# EAGLE board NixieClock_2_1 (EAGLE 9.2.1)
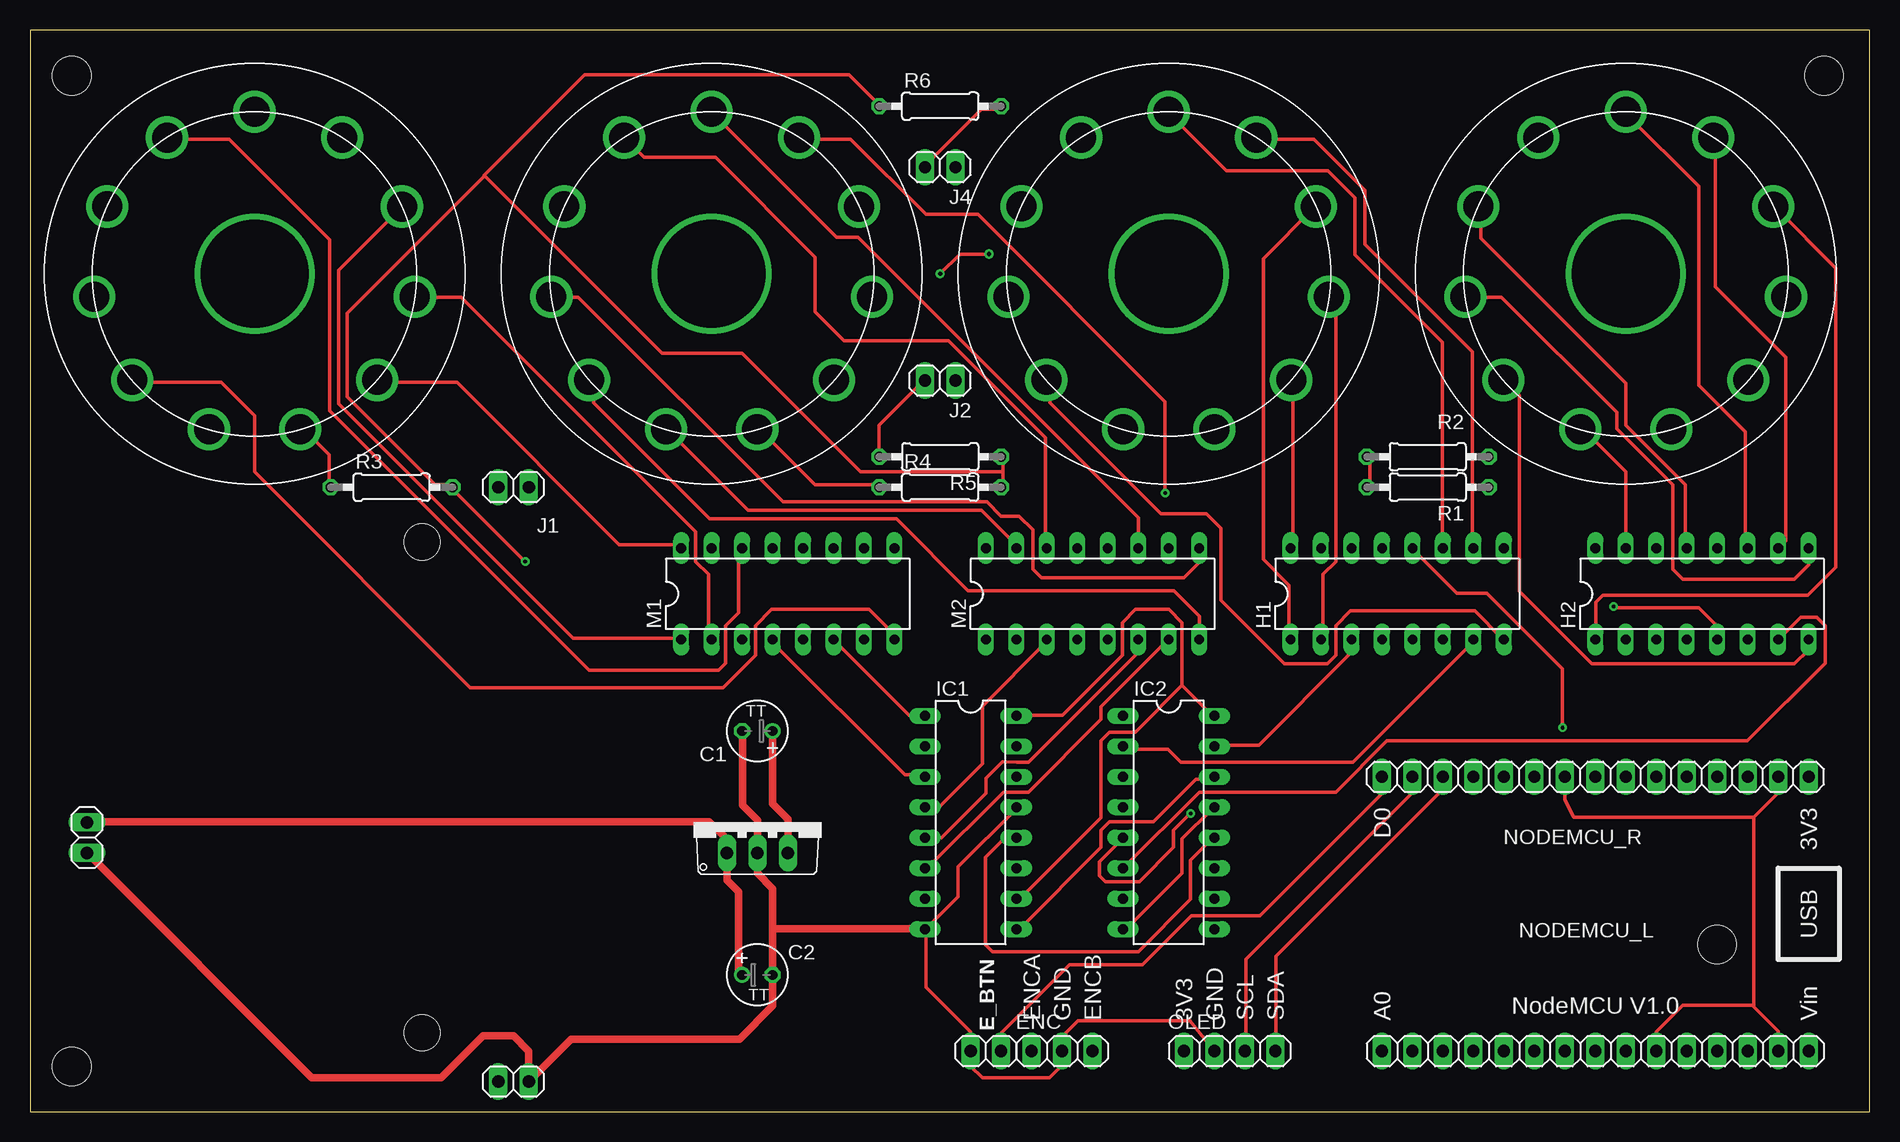
[diagram p0: board, top side]
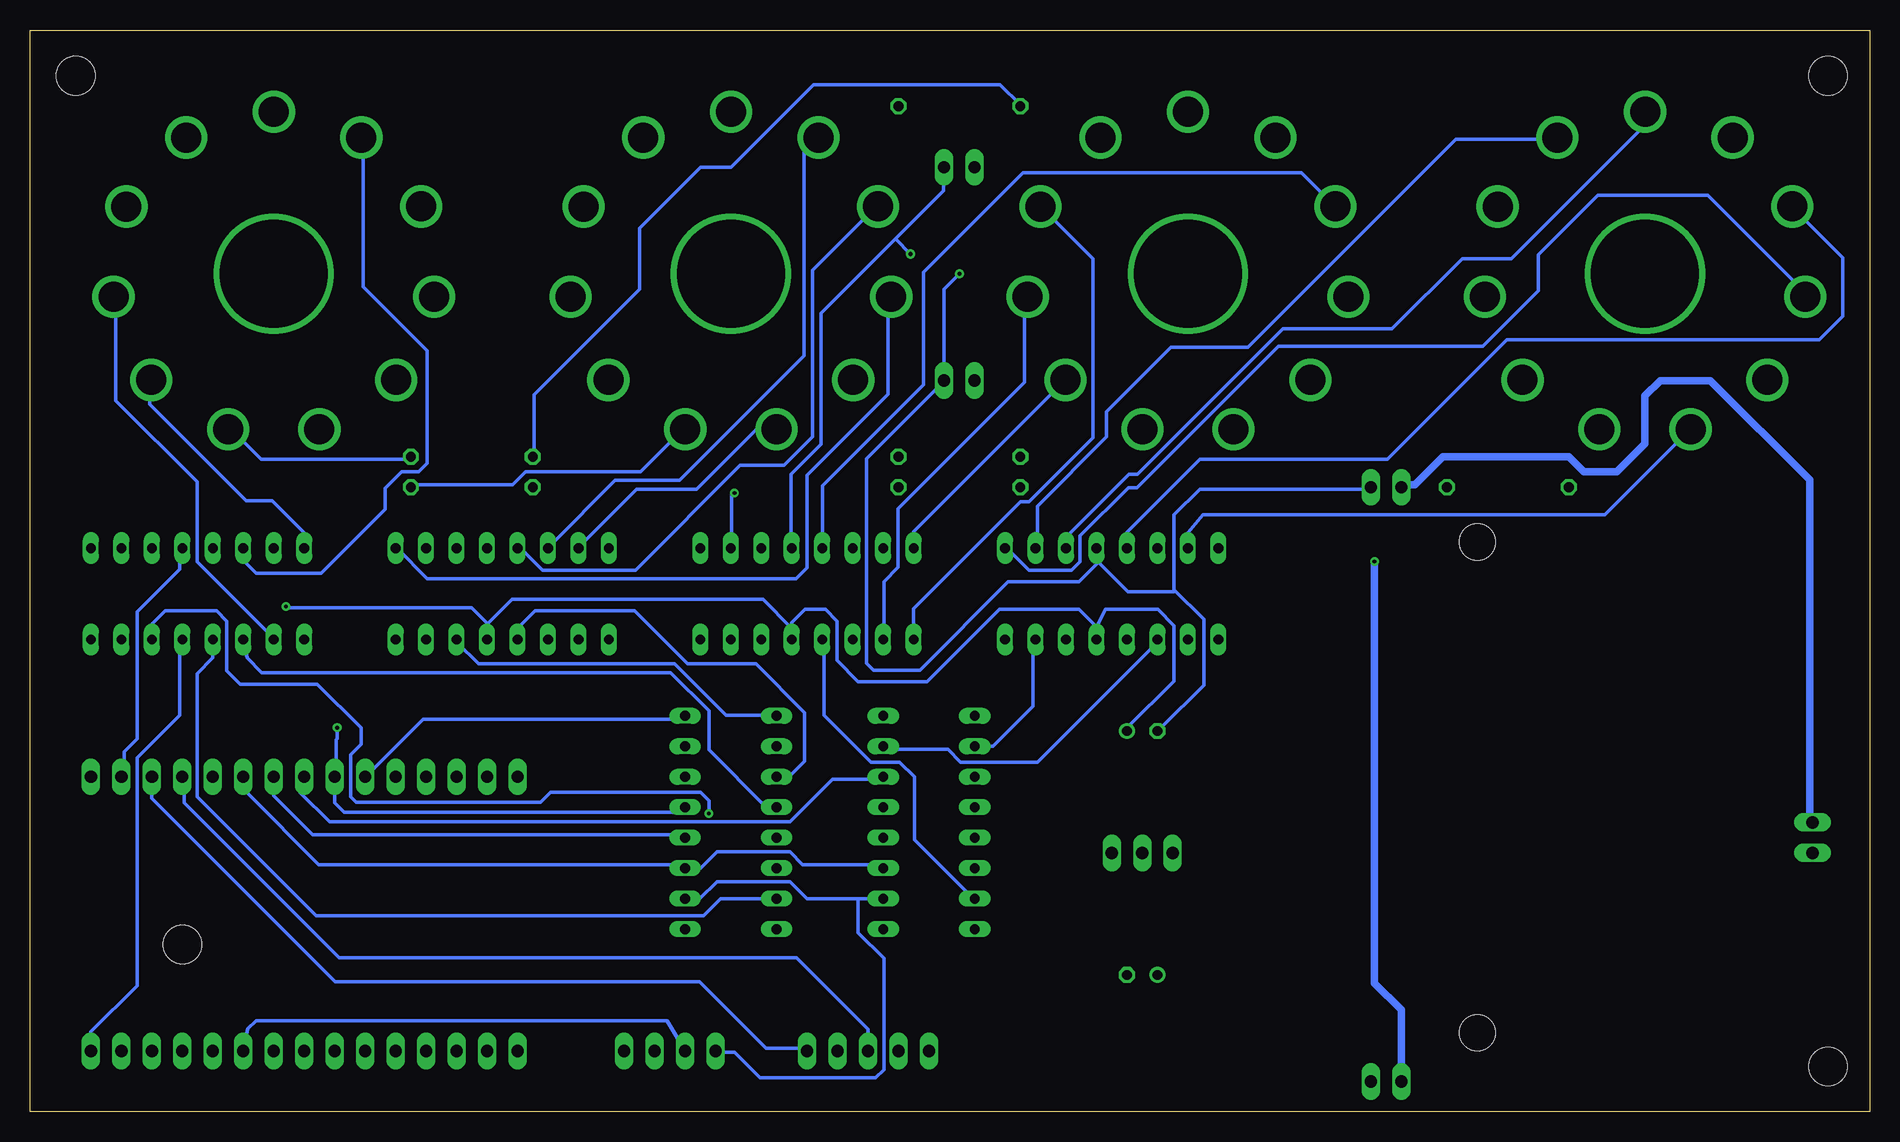
[diagram p1: board, bottom side, seen from below]

Size 153.34 x 90.16 mm. Coordinates in mm from the lower left corner, seen from the top.
Outline: 153.34,90.16 0,90.16 0,0 153.34,0 153.34,90.16
Copper layers (1*16): Top 0.035mm / dielectric 1.5mm / Bottom 0.035mm
Design rules "NYAKARUHAZ_StandardNYAK": minimum track width 6mil, minimum drill 12mil, track to track 6mil, track to pad 6mil, pad to pad 6mil, via to via 6mil, smd to smd 6mil, copper to edge 20mil, drill to drill 8mil, minimum pad ring 10mil, minimum via ring 8mil, stop-mask expansion 4mil, vias tented up to drill 0mil, thermal gap 6mil
Holes 3.2 mm at 149.53,86.35 3.48,86.35 140.64,13.96 3.48,3.8
Holes 3 mm at 32.69,47.49 32.69,6.59

## Footprints (pad centres in the part's own frame; a part is rotated, then mirrored left to right if it is on the bottom)
TT2D5 = drill 0.813: + -1.27,0 | drill 0.813 octagon: - 1.27,0
1X02 = drill 1.016 long: 1 -1.27,0; 2 1.27,0
1X03 = drill 1.016 long: 1 -2.54,0; 2 0,0; 3 2.54,0
DIL16 = drill 0.813 long: 1 -8.89,-3.81; 2 -6.35,-3.81; 3 -3.81,-3.81; 4 -1.27,-3.81; 5 1.27,-3.81; 6 3.81,-3.81; 7 6.35,-3.81; 8 8.89,-3.81; 9 8.89,3.81; 10 6.35,3.81; 11 3.81,3.81; 12 1.27,3.81; 13 -1.27,3.81; 14 -3.81,3.81; 15 -6.35,3.81; 16 -8.89,3.81
TO220V = drill 1.016 long: 1 -2.54,-2.54; 2 0,-2.54; 3 2.54,-2.54
1X15 = drill 1.016 long: 1 -17.78,0; 2 -15.24,0; 3 -12.7,0; 4 -10.16,0; 5 -7.62,0; 6 -5.08,0; 7 -2.54,0; 8 0,0; 9 2.54,0; 10 5.08,0; 11 7.62,0; 12 10.16,0; 13 12.7,0; 14 15.24,0; 15 17.78,0
1X04 = drill 1.016 long: 1 -3.81,0; 2 -1.27,0; 3 1.27,0; 4 3.81,0
0207/10 = drill 0.813 octagon: 1 -5.08,0; 2 5.08,0
LC-516 = drill 2.5: A 3.8,-12.95; P0 10.205,-8.84; P1 -3.8,-12.95; P2 -10.205,-8.84; P3 -13.365,-1.915; P4 -12.28,5.615; P5 -7.3,11.36; P6 -0.01,13.5; P7 7.295,11.355; P8 12.28,5.61; P9 13.36,-1.915 | drill 9: P$12 0,0

## Placement (x,y rotation side)
C1  1 uF  [TT2D5]  60.63,31.74 180 top
C2  22 uF  [TT2D5]  60.63,11.42 0 top
E_BTN  ENC_BTN  [1X02]  79.68,5.07 180 top
ENC  [1X03]  86.03,5.07 0 top
H1  74141N  [DIL16]  113.97,43.17 0 top
H2  74141N  [DIL16]  139.37,43.17 0 top
IC1  74HC595N  [DIL16]  78.41,24.12 270 top
IC2  74HC595N  [DIL16]  94.92,24.12 270 top
IC3  7805TV  [TO220V]  60.63,24.12 0 top
J1  12V  [1X02]  40.31,52.06 180 top
J2  GL  [1X02]  75.87,60.95 180 top
J3  170V  [1X02]  40.31,2.53 180 top
J4  GL  [1X02]  75.87,78.73 180 top
J5  12V  [1X02]  4.75,22.85 270 top
M1  74141N  [DIL16]  63.17,43.17 0 top
M2  74141N  [DIL16]  88.57,43.17 0 top
NODEMCU_L  [1X15]  130.48,5.07 0 top
NODEMCU_R  [1X15]  130.48,27.93 180 top
OLED  [1X04]  100,5.07 0 top
R1  15K  [0207/10]  116.51,52.06 180 top
R2  15K  [0207/10]  116.51,54.6 180 top
R3  15K  [0207/10]  30.15,52.06 0 top
R4  15K  [0207/10]  75.87,52.06 0 top
R5  100k  [0207/10]  75.87,54.6 180 top
R6  100k  [0207/10]  75.87,83.81 0 top
U$1M2  LC-516  [LC-516]  18.72,69.84 0 top
U$2M1  LC-516  [LC-516]  56.82,69.84 0 top
U$3H2  LC-516  [LC-516]  94.92,69.84 0 top
U$4H1  LC-516  [LC-516]  133.02,69.84 0 top

## Library data of the parts
C1 C2 = rcl; SPICEPREFIX: C
E_BTN ENC J1-J5 NODEMCU_L NODEMCU_R OLED = pinhead
H1 H2 M1 M2 = 74xx-us
IC1 IC2 = 74xx-eu
IC3 = linear
R1-R6 = resistor
U$1M2 U$2M1 U$3H2 U$4H1 = LC-516

## Nets
+3V3: IC1.10 IC1.16 IC2.10 IC2.16 NODEMCU_R.10 OLED.1
+5V: C1.+ H1.5 H2.5 IC3.3 M1.5 M2.5 NODEMCU_L.15
+12V: C2.+ IC3.1 J1.2 J5.1
D0: E_BTN.1 NODEMCU_R.15
D5: IC1.14 NODEMCU_R.8
D6: IC1.12 IC2.12 NODEMCU_R.7
D7: IC1.11 IC2.11 NODEMCU_R.6
D9: ENC.1 NODEMCU_R.4
D10: ENC.3 NODEMCU_R.3
GND: C1.- C2.- E_BTN.2 ENC.2 H1.12 H2.12 IC1.8 IC1.13 IC2.8 IC2.13 IC3.2 J1.1 J2.1 J3.1 J4.1 J5.2 M1.12 M2.12 NODEMCU_L.10 NODEMCU_L.14 NODEMCU_R.2 NODEMCU_R.9 OLED.2
H2_0: H2.16 U$4H1.P0
H2_1: H2.15 U$4H1.P1
H2_2: H2.8 U$4H1.P2
H2_3: H2.9 U$4H1.P3
H2_4: H2.13 U$4H1.P4
H2_5: H2.14 U$4H1.P5
H2_6: H2.11 U$4H1.P6
H2_7: H2.10 U$4H1.P7
H2_8: H2.1 U$4H1.P8
H2_9: H2.2 U$4H1.P9
N$1: H1.16 U$3H2.P0
N$2: H1.2 U$3H2.P9
N$3: H1.9 U$3H2.P3
N$4: H1.13 U$3H2.P4
N$5: H1.14 U$3H2.P5
N$6: H1.11 U$3H2.P6
N$7: H1.10 U$3H2.P7
N$8: H1.1 U$3H2.P8
N$9: H1.8 U$3H2.P2
N$10: H1.15 U$3H2.P1
N$11: R1.1 U$3H2.A
N$12: J4.2 R6.2
N$13: J2.2 R5.2
N$22: R2.1 U$4H1.A
N$23: M1.16 U$1M2.P0
N$24: M1.9 U$1M2.P3
N$25: M1.13 U$1M2.P4
N$26: M1.14 U$1M2.P5
N$27: M1.11 U$1M2.P6
N$28: M1.10 U$1M2.P7
N$29: M1.1 U$1M2.P8
N$30: M1.2 U$1M2.P9
N$31: M1.8 U$1M2.P2
N$32: M1.15 U$1M2.P1
N$33: R3.1 U$1M2.A
N$34: M2.16 U$2M1.P0
N$35: M2.9 U$2M1.P3
N$36: M2.13 U$2M1.P4
N$37: M2.14 U$2M1.P5
N$38: M2.11 U$2M1.P6
N$39: M2.10 U$2M1.P7
N$40: M2.1 U$2M1.P8
N$41: M2.2 U$2M1.P9
N$42: M2.8 U$2M1.P2
N$43: M2.15 U$2M1.P1
N$44: R4.1 U$2M1.A
N$45: IC1.15 M1.3
N$46: IC1.1 M1.6
N$47: IC1.2 M1.7
N$48: IC1.3 M1.4
N$49: IC1.4 M2.3
N$50: IC1.5 M2.6
N$51: IC1.6 M2.7
N$52: IC1.7 M2.4
N$53: H1.3 IC2.15
N$54: H1.6 IC2.1
N$55: H1.7 IC2.2
N$56: H1.4 IC2.3
N$57: H2.3 IC2.4
N$58: H2.6 IC2.5
N$59: H2.7 IC2.6
N$60: H2.4 IC2.7
N$61: IC1.9 IC2.14
SCL: NODEMCU_R.14 OLED.3
SDA: NODEMCU_R.13 OLED.4
V+: J3.2 R1.2 R2.2 R3.2 R4.2 R5.1 R6.1

## Tracks (layer width: path | path; a pad name or v marks a point on that pad's centre or on a via)
+3V3
  Top 0.305: 96.04,35.55 96.04,40.78 94.95,41.88 92.15,41.88 91.06,40.78 91.06,38.04 86.08,33.06 82.53,33.06 IC1.16 | 96.04,35.55 98.53,33.06 IC2.16 | 96.04,35.55 92.13,31.64 89.99,31.64 89.28,30.93 89.28,24.53 82.53,17.77 IC1.10
  Bottom 0.305: 84.3,17.77 88.57,17.77 89.99,19.19 96.09,19.19 97.51,17.77 IC2.10 | 84.3,17.77 IC1.10 | 84.3,17.77 84.3,14.93 82.17,12.79 82.17,3.52 82.86,2.84 92.48,2.84 94.61,4.97 96.04,4.97 OLED.1 | NODEMCU_R.10 125.2,28.08 120.57,32.71 98.88,32.71 IC2.16
+5V  (via drill 0.3)
  Top 0.305: H2.5 140.64,40.45 139.09,42 132.13,42 v132,42.13
  Top 0.61: C1.+ 61.9,25.67 63.17,24.4 IC3.3
  Bottom 0.305: NODEMCU_L.15 148.26,6.67 144.4,10.53 144.4,29.5 140.84,33.06 140.84,39.11 H2.5 | C1.+ 61.9,31.99 57.99,35.91 57.99,40.53 59.34,41.88 63.69,41.88 64.44,40.38 M1.5 64.44,40.43 65.89,41.88 72.54,41.88 78.56,35.86 84.3,35.86 86.08,37.63 86.08,40.91 87.05,41.88 88.75,41.88 89.84,40.78 M2.5 89.84,40.33 92.23,42.71 113.13,42.71 115.18,40.67 | v132,42.13 131.88,42 116.51,42 115.18,40.67 | 115.18,40.67 114.99,40.48 115.62,39.84 115.24,39.46 H1.5
+12V
  Top 0.61: C2.+ 59.05,11.72 59.05,18.33 58.09,19.29 IC3.1 58.09,22.72 56.62,24.2 4.83,24.2 J5.1
  Bottom 0.305: 38.79,52.26 J1.2 | 5,24.17 J5.1
  Bottom 0.61: 38.79,52.26 37.92,52.26 35.59,54.6 25.07,54.6 23.8,53.33 21.08,53.33 18.72,55.69 18.72,59.68 17.45,60.95 13.28,60.95 5,52.67 5,24.17
D0
  Top 0.305: NODEMCU_R.15 112.7,26.51 102.54,16.35 96.83,16.35 92.74,12.26 86.64,12.26 80.95,6.57 E_BTN.1
D5
  Bottom 0.305: IC1.14 82.53,27.73 86.44,27.73 89.99,24.17 128.37,24.17 130.81,26.61 NODEMCU_R.8
D6
  Top 0.305: IC1.12 81.25,22.85 79.63,21.22 79.63,13.94 80.21,13.35 92.38,13.35 96.75,17.72 96.75,20.97 98.53,22.75 IC2.12
  Bottom 0.305: NODEMCU_R.7 133.02,26.33 129.79,23.1 98.88,23.1 IC2.12
D7
  Bottom 0.305: IC1.11 82.53,20.61 88.93,20.61 89.99,21.68 96.06,21.68 97.44,20.31 IC2.11 98.88,20.61 129.29,20.61 135.21,26.54 NODEMCU_R.6
D9
  Bottom 0.305: ENC.1 83.49,6.87 89.46,12.84 127.56,12.84 140.49,25.77 140.49,27.73 NODEMCU_R.4
D10
  Bottom 0.305: NODEMCU_R.3 143.18,26.15 127.89,10.86 97.54,10.86 92,5.32 88.57,5.32 ENC.3
GND  (via drill 0.3, 0.35)
  Top 0.305: NODEMCU_L.10 135.56,6.67 137.77,8.88 143.69,8.88 | NODEMCU_L.14 145.72,6.72 143.69,8.75 143.69,8.88 | 143.69,24.55 143.69,8.88 | NODEMCU_R.2 145.72,26.58 143.69,24.55 | IC2.8 91.42,15.28 96.04,19.9 96.04,22.75 98.53,25.24 IC2.13 | v127.74,32.02 127.74,36.92 121.44,43.22 118.95,43.22 115.24,46.93 H1.12 | 143.69,24.55 128.68,24.55 127.94,26.02 NODEMCU_R.9 | IC1.8 74.7,14.93 74.7,10.4 78.41,6.7 E_BTN.2 78.41,3.8 79.38,2.84 84.96,2.84 86.03,3.9 ENC.2 86.34,6.59 87.35,7.61 96.7,7.61 OLED.2 | IC1.13 82.17,25.24 77.37,20.44 77.37,17.95 74.7,15.28 IC1.8 | 59.41,31.64 C1.- | 74.35,15.28 IC1.8 | v75.87,69.84 77.52,71.49 v79.93,71.49
  Top 0.61: 61.9,15.28 61.9,18.61 60.63,19.88 IC3.2 60.63,24.32 59.41,25.54 59.41,31.64 | 61.9,15.28 C2.- 61.9,8.83 59.13,6.06 45.11,6.06 J3.1 41.58,5.07 40.31,6.34 37.77,6.34 34.27,2.84 23.5,2.84 J5.2 | 61.9,15.28 74.35,15.28
  Bottom 0.305: H2.12 140.84,46.93 140.84,45.23 144.4,41.67 144.4,31.08 145.47,30.01 145.47,28.08 NODEMCU_R.2 | v127.74,32.02 127.74,31.1 127.81,31.03 127.81,28.01 NODEMCU_R.9 127.94,25.77 127.15,24.98 99.14,24.98 IC2.13 | M2.12 89.89,47.03 89.89,53.15 87.4,55.64 87.4,66.54 81.19,72.75 | 81.19,72.75 77.19,76.75 77.19,78.58 J4.1 | 64.29,45.81 61.82,43.35 57.99,43.35 57.99,43.53 | 64.29,45.81 64.31,45.84 64.31,46.85 M1.12 | 57.99,43.53 55.5,41.04 55.5,35.55 59.05,31.99 C1.- | 57.99,43.53 57.99,49.75 55.83,51.91 41.63,51.91 J1.1 | 64.29,45.81 65.91,44.19 71.81,44.19 79.17,36.82 83.03,36.82 83.59,37.38 83.59,54.45 77.17,60.87 J2.1 77.14,68.57 v75.87,69.84 | NODEMCU_L.10 135.19,6.91 134.49,7.61 100.23,7.61 98.73,5.11 OLED.2 | v79.93,71.49 81.19,72.75
H2_0
  Bottom 0.305: H2.16 130.48,48.25 133.15,50.92 135.31,50.92 143.36,58.97 143.36,60.87 U$4H1.P0
H2_1
  Top 0.305: H2.15 133.02,53.33 129.46,56.89 U$4H1.P1
H2_2
  Top 0.305: H2.8 148.26,38.52 147.07,37.33 130.17,37.33 124.13,43.37 124.13,59.73 123.06,60.8 U$4H1.P2
H2_3
  Top 0.305: H2.9 148.26,45.58 147.07,44.39 137.77,44.39 136.93,45.23 136.93,52.26 132.26,56.94 132.26,58.31 122.66,67.91 119.86,67.91 U$4H1.P3
H2_4
  Top 0.305: H2.13 138,47.29 138,52.26 133.02,57.24 133.02,60.72 120.93,72.81 120.93,75.38 U$4H1.P4
H2_5
  Bottom 0.305: H2.14 135.56,45.96 134.49,44.9 129.06,44.9 123.72,50.23 123.72,51.98 122.38,53.33 120.93,53.33 120.22,54.04 120.22,63.41 125.55,68.75 125.55,81.07 U$4H1.P5
H2_6
  Top 0.305: H2.11 142.98,47.29 142.98,56.68 139.09,60.57 139.09,77.13 133.02,83.2 U$4H1.P6
H2_7
  Top 0.305: H2.10 146.35,47.62 146.35,62.88 140.49,68.75 140.49,81.07 U$4H1.P7
H2_8
  Top 0.305: H2.1 130.53,39.46 130.53,42.48 131.09,43.04 148.18,43.04 150.52,45.38 150.52,70.32 145.47,75.38 U$4H1.P8
H2_9
  Bottom 0.305: H2.2 133.02,39.46 139.42,45.86 139.42,52.52 146.18,59.27 146.18,67.91 U$4H1.P9
N$1
  Top 0.305: H1.16 105.28,47.29 105.28,60.8 U$3H2.P0
N$2
  Top 0.305: H1.2 107.77,39.46 107.77,44.8 108.84,45.86 108.84,67.55 108.48,67.91 U$3H2.P9
N$3
  Bottom 0.305: H1.9 122.71,46.93 120.22,44.44 89.48,44.44 88.57,45.35 88.57,53.05 81.81,59.81 81.81,67.91 U$3H2.P3
N$4
  Bottom 0.305: H1.13 112.39,46.93 110.62,45.15 102.87,45.15 94.13,53.89 90.48,53.89 88.11,56.25 88.11,70.14 82.88,75.38 U$3H2.P4
N$5
  Bottom 0.305: H1.14 109.91,47.29 104.57,52.62 99.21,52.62 88.82,63.01 88.82,80.1 87.86,81.07 U$3H2.P5
N$6
  Top 0.305: H1.11 117.73,47.29 117.73,64.15 110.44,71.44 110.44,76.19 108.2,78.42 99.75,78.42 94.97,83.2 U$3H2.P6
N$7
  Top 0.305: H1.10 120.22,47.29 120.22,63.36 111.28,72.3 111.28,76.8 107.01,81.07 102.44,81.07 U$3H2.P7
N$8
  Top 0.305: H1.1 104.93,39.46 104.93,43.91 102.79,46.04 102.79,71.11 107.06,75.38 U$3H2.P8
N$9
  Top 0.305: H1.8 122.71,39.46 120.42,41.75 110.06,41.75 108.84,40.53 108.84,38.04 108.13,37.33 104.57,37.33 99.26,42.64 99.26,48.63 98.04,49.85 94.26,49.85 85.01,59.1 85.01,60.8 U$3H2.P2
N$10
  Bottom 0.305: H1.15 107.42,47.29 102.79,51.91 97.79,51.91 92.83,56.87 U$3H2.P1
N$11
  Bottom 0.305: R1.1 121.28,52.26 113.11,52.26 112.04,53.33 102.44,53.33 98.88,56.89 U$3H2.A
N$12
  Top 0.305: R6.2 80.75,83.56 79.32,83.56 74.7,78.93 J4.2
N$13
  Top 0.305: R5.2 70.79,57.24 74.35,60.8 J2.2
N$22
  Bottom 0.305: R2.1 121.64,54.4 134.09,54.4 136.58,56.89 U$4H1.A
N$23
  Top 0.305: M1.16 54.08,47.29 49.1,47.29 35.59,60.8 29.19,60.8 U$1M2.P0
N$24
  Bottom 0.305: M1.9 71.86,46.93 70.08,45.15 66.52,45.15 65.81,45.86 65.81,48 61.77,52.04 61.06,52.04 49.28,63.82 32.23,63.82 27.61,68.44 27.61,71.44 22.66,76.39 13.49,76.39 5.36,68.27 U$1M2.P3
N$25
  Bottom 0.305: M1.13 61.9,48.3 55.8,54.4 40.18,54.4 30.23,64.35 4.19,64.35 2.23,66.31 2.23,71.19 6.43,75.38 U$1M2.P4
N$26
  Top 0.305: M1.14 59.05,46.93 59.05,41.59 57.99,40.53 57.99,37.4 57.4,36.82 46.58,36.82 24.97,58.44 24.97,72.68 16.59,81.07 11.76,81.07 U$1M2.P5
N$27
  Bottom 0.305: M1.11 66.88,47.29 66.88,48 61.75,53.13 61.04,53.13 48.9,65.27 39.8,65.27 33.96,71.11 29.87,71.11 18.71,82.27 U$1M2.P6
N$28
  Bottom 0.305: M1.10 69.37,47.29 69.37,50.48 63.6,56.25 63.6,58.33 58.22,63.72 51.82,63.72 34.47,81.07 26.34,81.07 U$1M2.P7
N$29
  Top 0.305: M1.1 54.08,39.46 45.26,39.46 25.73,58.99 25.73,70.14 30.96,75.38 U$1M2.P8
N$30
  Top 0.305: M1.2 56.57,39.46 56.57,44.8 55.5,45.86 55.5,48.35 35.94,67.91 32.39,67.91 U$1M2.P9
N$31
  Top 0.305: M1.8 72.06,39.77 69.95,41.88 61.82,41.88 60.48,40.53 60.48,38.04 57.79,35.35 36.7,35.35 18.72,53.33 18.72,58.03 15.95,60.8 8.56,60.8 U$1M2.P2
N$32
  Bottom 0.305: M1.15 56.82,48.25 55.55,49.77 22.07,49.77 14.96,56.89 U$1M2.P1
N$33
  Top 0.305: R3.1 24.92,52.26 24.92,54.75 22.78,56.89 U$1M2.A
N$34
  Bottom 0.305: M2.16 79.68,48.35 67.23,60.8 U$2M1.P0
N$35
  Top 0.305: M2.9 97.46,45.79 96.19,44.52 84.3,44.52 83.59,45.23 83.59,48.5 82.45,49.65 80.95,49.65 79.76,50.84 62.76,50.84 45.7,67.91 43.76,67.91 U$2M1.P3
N$36
  Bottom 0.305: M2.13 87.28,47.03 87.28,52.19 78.87,60.59 78.87,69.97 70.59,78.25 47.35,78.25 44.83,75.73 U$2M1.P4
N$37
  Top 0.305: M2.14 84.66,47.29 84.66,56.18 76.56,64.28 67.84,64.28 65.46,66.66 65.46,71.24 57.15,79.54 51.18,79.54 U$2M1.P5
N$38
  Top 0.305: M2.11 92.38,49.52 69.01,72.89 67.23,72.89 56.92,83.2 U$2M1.P6
N$39  (via drill 0.3)
  Top 0.305: v94.61,51.58 94.61,59.2 79.02,74.79 74.68,74.79 68.4,81.07 64.39,81.07 U$2M1.P7
  Bottom 0.305: v94.61,51.58 94.87,51.32 94.87,47.03 M2.10
N$40
  Bottom 0.305: M2.1 79.68,41.95 70.79,50.84 70.08,50.84 64.75,56.18 64.75,71.11 69.01,75.38 U$2M1.P8
N$41
  Bottom 0.305: M2.2 82.17,39.46 82.17,44.19 80.98,45.38 80.98,50.26 70.43,60.8 70.43,67.91 U$2M1.P9
N$42
  Top 0.305: M2.8 97.46,41.32 95.35,43.42 78.21,43.42 72.21,49.42 56.64,49.42 46.97,59.1 46.97,60.8 U$2M1.P2
N$43
  Top 0.305: M2.15 82.17,47.29 79.32,50.13 59.87,50.13 53.11,56.89 U$2M1.P1
N$44
  Top 0.305: R4.1 70.79,52.26 65.46,52.26 60.83,56.89 U$2M1.A
N$45
  Bottom 0.305: IC1.15 82.17,30.22 76.84,30.22 75.77,29.15 69.37,29.15 59.41,39.11 M1.3
N$46
  Top 0.305: M1.6 73.28,33.06 74.35,33.06 IC1.1
N$47
  Bottom 0.305: M1.7 69.72,39.11 69.72,33.8 73.05,30.47 IC1.2
N$48
  Top 0.305: IC1.3 74.35,28.08 72.92,28.08 61.9,39.11 M1.4
N$49
  Top 0.305: IC1.4 75.77,25.39 79.38,29 79.38,33.82 84.66,39.11 M2.3
N$50
  Top 0.305: IC1.5 75.97,22.85 79.68,26.56 79.68,27.8 81.07,29.19 82.27,29.15 83.24,29.15 92.13,38.04 92.13,39.11 M2.6
N$51
  Top 0.305: IC1.6 74.78,20.31 81.13,26.66 83.24,26.66 89.28,32.71 89.28,33.77 94.61,39.11 M2.7
N$52
  Bottom 0.305: IC1.7 74.7,17.77 79.63,22.7 79.63,27.93 80.85,29.15 83.24,29.15 87.15,33.06 87.15,39.11 M2.4
N$53
  Top 0.305: IC2.15 98.88,30.57 102.44,30.57 109.91,38.04 109.91,39.11 H1.3
N$54
  Bottom 0.305: IC2.1 91.42,33.06 95.33,33.06 99.59,37.33 115.95,37.33 117.73,39.11 H1.6
N$55
  Top 0.305: IC2.2 91.42,30.22 94.87,30.22 95.94,29.15 110.26,29.15 120.22,39.11 H1.7
N$56
  Bottom 0.305: IC2.3 90.07,27.93 88.77,29.22 88.77,33.26 92.84,37.33 98.53,37.33 102.95,41.75 111.25,41.75 112.7,40.3 H1.4
N$57
  Bottom 0.305: IC2.4 91.97,25.39 96.75,30.16 96.75,33.42 99.95,36.62 134.04,36.62 135.25,37.84 H2.3
N$58  (via drill 0.3)
  Top 0.305: v96.75,24.88 95.33,23.46 95.33,22.04 92.48,19.19 89.64,19.19 89.15,19.67 89.15,20.84 91.06,22.75 IC2.5
  Bottom 0.305: v96.75,24.88 96.75,25.95 97.46,26.66 109.93,26.66 110.77,25.82 126.16,25.82 126.62,26.28 126.62,29.76 125.76,30.62 125.76,31.99 129.41,35.65 135.84,35.65 136.93,36.74 136.93,40.91 137.77,41.75 142.09,41.75 143.18,40.66 H2.6
N$59
  Top 0.305: IC2.6 97.46,26.66 108.84,26.66 113.11,30.93 143.16,30.93 149.63,37.4 149.63,40.53 148.92,41.24 147.6,41.24 H2.7
N$60
  Bottom 0.305: IC2.7 95.76,17.77 97.18,16.35 129.49,16.35 139.42,26.28 139.42,36.52 138.1,37.84 H2.4
N$61
  Top 0.305: IC1.9 82.53,15.28 89.28,22.04 89.28,23.46 89.99,24.17 93.65,24.17 97.21,27.73 98.53,27.73 IC2.14
SCL
  Top 0.305: OLED.3 101.37,5.32 101.37,12.71 115.24,26.58 NODEMCU_R.14
SDA
  Top 0.305: OLED.4 103.86,5.32 103.86,12.97 117.43,26.54 NODEMCU_R.13
V+  (via drill 0.3)
  Top 0.305: R1.2 111.68,52.26 111.68,54.4 R2.2 | 81.1,53.33 81.1,54.4 R5.1 | 81.1,53.33 81.1,52.26 R4.2 | 37.9,77.99 26.44,66.54 26.44,59.58 33.76,52.26 35.23,52.26 R3.2 35.23,51.91 v41.27,45.86 | R6.1 70.79,83.91 68.25,86.45 46.23,86.45 37.83,78.06 37.9,77.99 | 81.1,53.33 69.24,53.33 59.36,63.21 52.68,63.21 37.9,77.99
  Bottom 0.305: R2.2 111.33,54.75 111.33,59.78 102.54,68.57 102.54,73.65 97.46,78.73 94.92,78.73 88.04,85.61 72.49,85.61 70.79,83.91 R6.1
  Bottom 0.61: v41.27,45.86 41.27,10.73 39.04,8.5 J3.2

## Text on the board
tPlace: D0 | 3V3 | USB | NodeMCU V1.0 | ENCA | GND | ENCB | 3V3 | GND | SCL | SDA | A0 | Vin
tValues: + | Nixie 1.1 GP 2019 | + | - | +